# EAGLE board LibreServo_v1_a (EAGLE 9.2.0), part 1 of 2
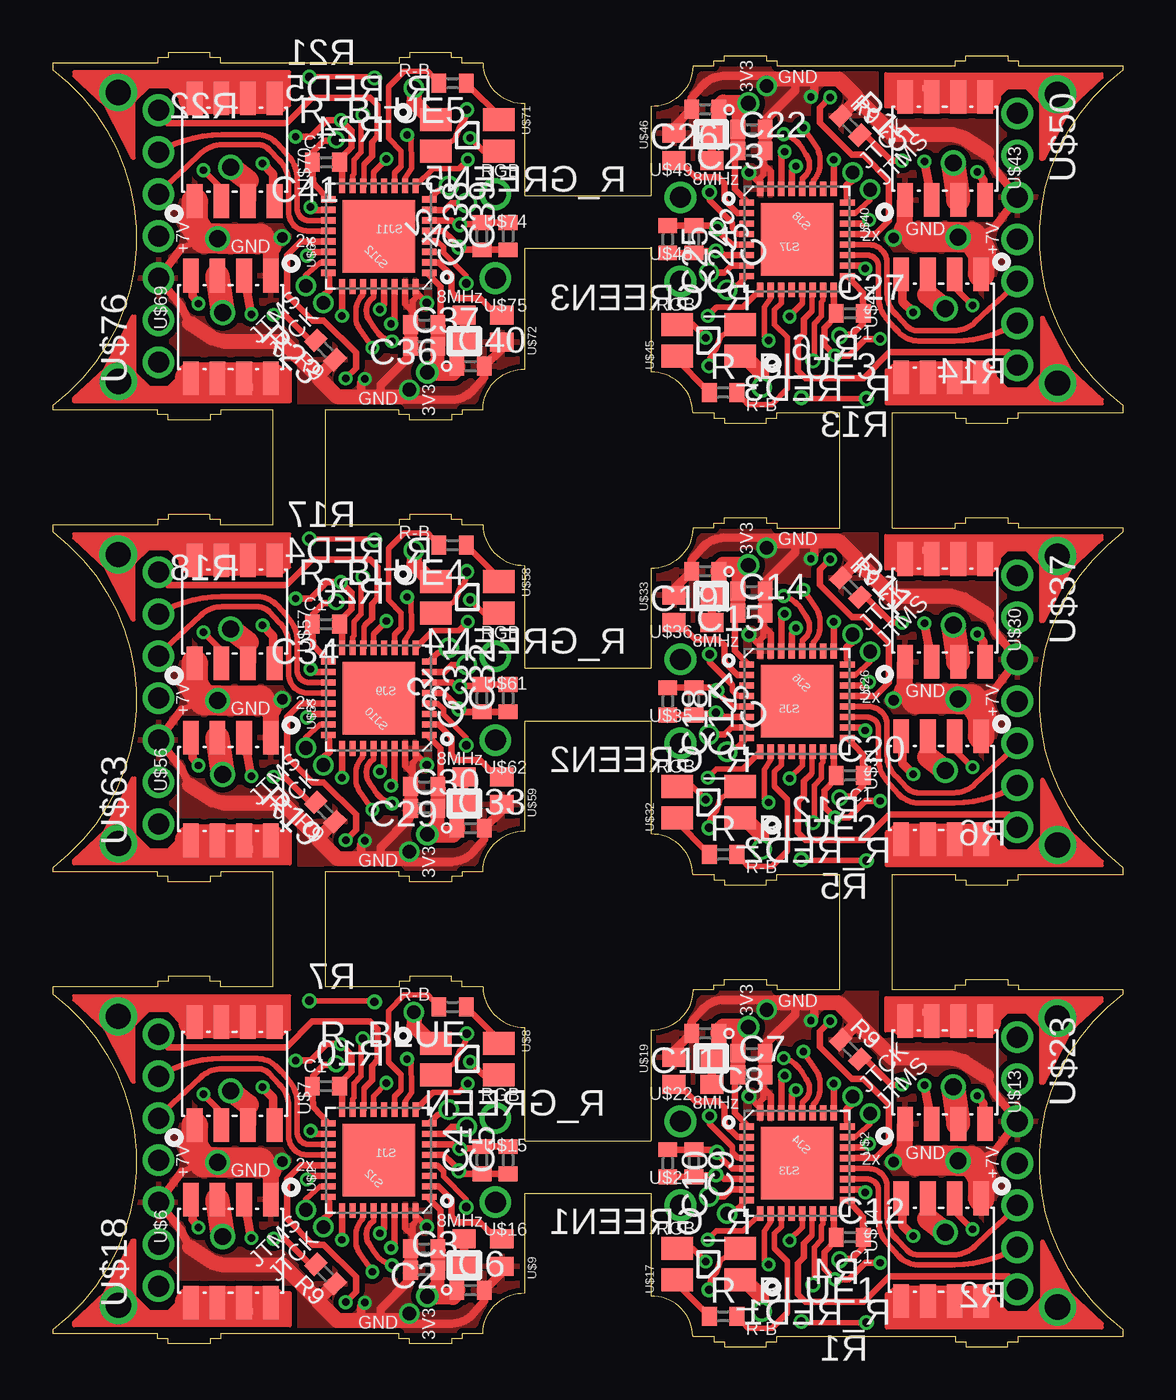
[diagram p0: board, top side]
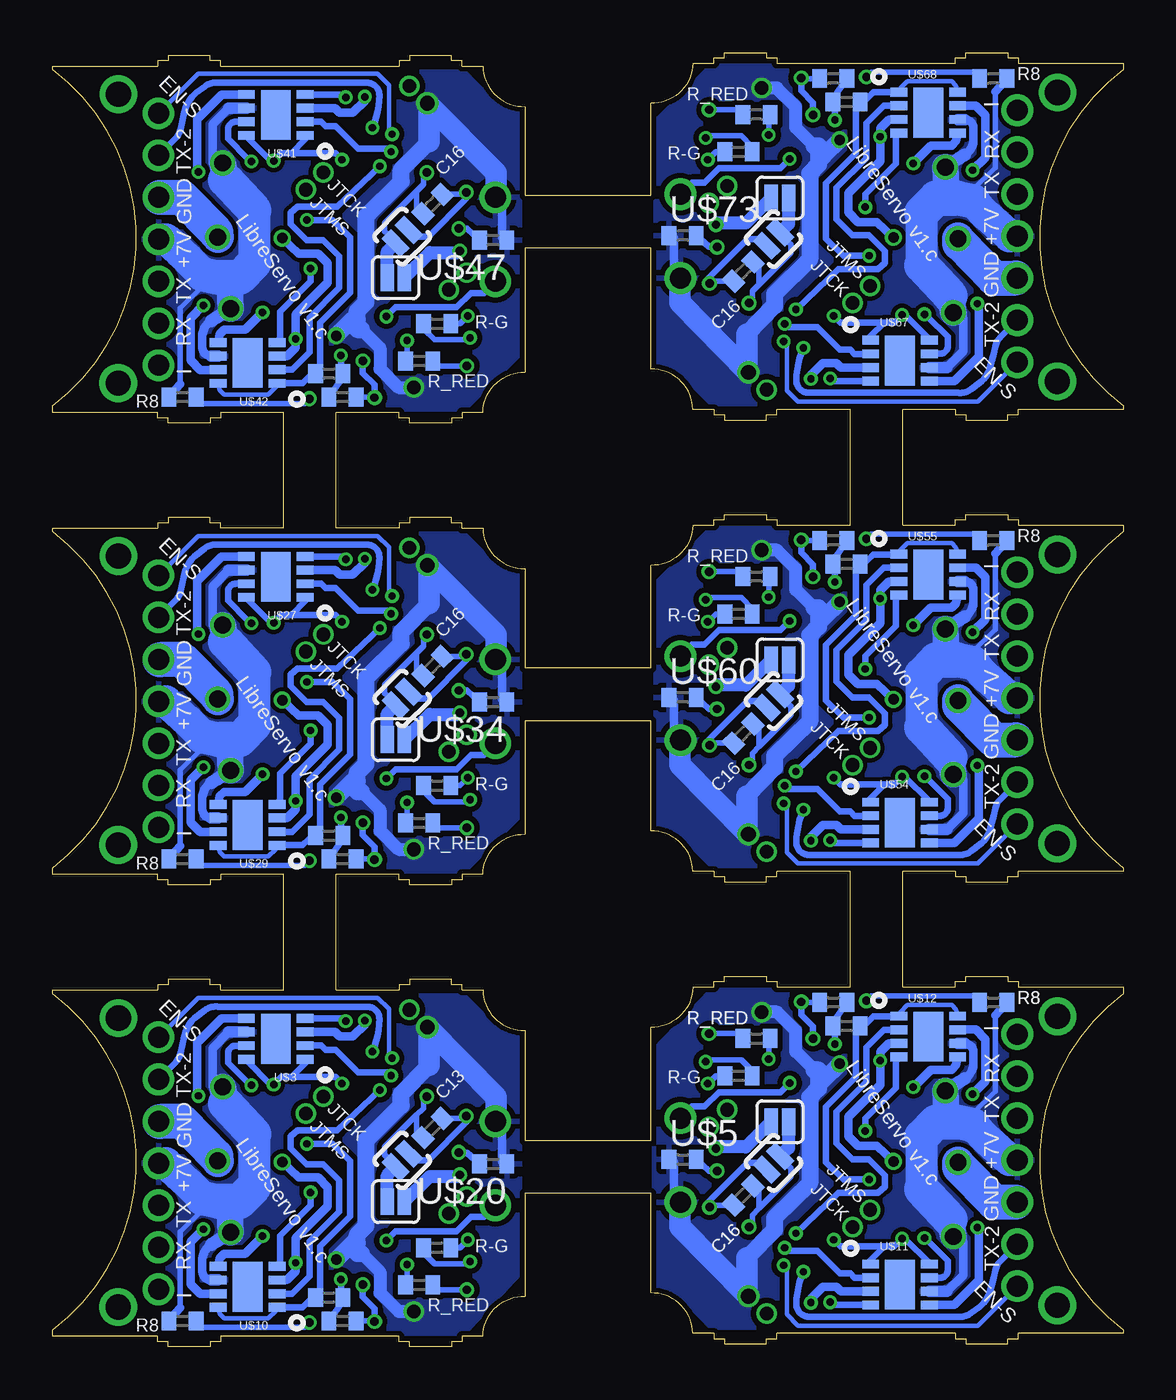
[diagram p1: board, bottom side, seen from below]

Size 51 x 61.65 mm. Coordinates in mm from the lower left corner, seen from the top.
Outline: 20.5,17.15 19.5,17.15 19.5,17.4 19,17.4 19,17.65 17,17.65 17,17.4 16.5,17.4 16.5,17.15 13,17.15 13,22.65 16.5,22.65 16.5,22.4 17,22.4 17,22.15 19,22.15 19,22.4 19.5,22.4 19.5,22.65 20.5,22.65 arc-90 22.5,24.57 22.5,29.82 28.5,29.82 28.5,24.43 arc-90 30.5,22.5 31.5,22.5 31.5,22.25 32,22.25 32,22 34,22 34,22.25 34.5,22.25 34.5,22.5 37.5,22.5 37.5,17 34.5,17 34.5,17.25 34,17.25 34,17.5 32,17.5 32,17.25 31.5,17.25 31.5,17 30.5,17 arc-90 28.5,15.07 28.5,9.82 22.5,9.82 22.5,15.22 arc-90 20.5,17.15
Outline: 10.5,17.15 8,17.15 8,17.4 7.5,17.4 7.5,17.65 5.5,17.65 5.5,17.4 5,17.4 5,17.15 0,17.15 0,16.82 arc-106 0,0.82 0,0.65 5,0.65 5,0.4 5.5,0.4 5.5,0.15 7.5,0.15 7.5,0.4 8,0.4 8,0.65 16.5,0.65 16.5,0.4 17,0.4 17,0.15 19,0.15 19,0.4 19.5,0.4 19.5,0.65 20.5,0.65 arc-90 22.5,2.58 22.5,7.33 28.5,7.33 28.5,2.43 arc-90 30.5,0.5 31.5,0.5 31.5,0.25 32,0.25 32,0 34,0 34,0.25 34.5,0.25 34.5,0.5 43,0.5 43,0.25 43.5,0.25 43.5,0 45.5,0 45.5,0.25 46,0.25 46,0.5 51,0.5 51,0.82 arc-106 51,16.82 51,17 46,17 46,17.25 45.5,17.25 45.5,17.5 43.5,17.5 43.5,17.25 43,17.25 43,17 40,17 40,22.5 43,22.5 43,22.25 43.5,22.25 43.5,22 45.5,22 45.5,22.25 46,22.25 46,22.5 51,22.5 51,22.82 arc-106 51,38.83 51,39 46,39 46,39.25 45.5,39.25 45.5,39.5 43.5,39.5 43.5,39.25 43,39.25 43,39 40,39 40,44.5 43,44.5 43,44.25 43.5,44.25 43.5,44 45.5,44 45.5,44.25 46,44.25 46,44.5 51,44.5 51,44.83 arc-106 51,60.83 51,61 46,61 46,61.25 45.5,61.25 45.5,61.5 43.5,61.5 43.5,61.25 43,61.25 43,61 34.5,61 34.5,61.25 34,61.25 34,61.5 32,61.5 32,61.25 31.5,61.25 31.5,61 30.5,61 arc-90 28.5,59.08 28.5,54.83 22.5,54.83 22.5,59.23 arc-90 20.5,61.15 19.5,61.15 19.5,61.4 19,61.4 19,61.65 17,61.65 17,61.4 16.5,61.4 16.5,61.15 8,61.15 8,61.4 7.5,61.4 7.5,61.65 5.5,61.65 5.5,61.4 5,61.4 5,61.15 0,61.15 0,60.83 arc-106 0,44.83 0,44.65 5,44.65 5,44.4 5.5,44.4 5.5,44.15 7.5,44.15 7.5,44.4 8,44.4 8,44.65 10.5,44.65 10.5,39.15 8,39.15 8,39.4 7.5,39.4 7.5,39.65 5.5,39.65 5.5,39.4 5,39.4 5,39.15 0,39.15 0,38.83 arc-106 0,22.82 0,22.65 5,22.65 5,22.4 5.5,22.4 5.5,22.15 7.5,22.15 7.5,22.4 8,22.4 8,22.65 10.5,22.65 10.5,17.15
Outline: 31.5,39 30.5,39 arc-90 28.5,37.08 28.5,32.33 22.5,32.33 22.5,37.23 arc-90 20.5,39.15 19.5,39.15 19.5,39.4 19,39.4 19,39.65 17,39.65 17,39.4 16.5,39.4 16.5,39.15 13,39.15 13,44.65 16.5,44.65 16.5,44.4 17,44.4 17,44.15 19,44.15 19,44.4 19.5,44.4 19.5,44.65 20.5,44.65 arc-90 22.5,46.58 22.5,52.33 28.5,52.33 28.5,46.43 arc-90 30.5,44.5 31.5,44.5 31.5,44.25 32,44.25 32,44 34,44 34,44.25 34.5,44.25 34.5,44.5 37.5,44.5 37.5,39 34.5,39 34.5,39.25 34,39.25 34,39.5 32,39.5 32,39.25 31.5,39.25 31.5,39
Copper layers (1*16): Top 0.035mm / dielectric 1.5mm / Bottom 0.035mm
Design rules "ITEADstudio_DRC": minimum track width 6mil, minimum drill 12mil, track to track 6mil, track to pad 6mil, pad to pad 6mil, via to via 6mil, smd to smd 0mil, copper to edge 10mil, drill to drill 10mil, minimum pad ring 10mil, minimum via ring 6mil, stop-mask expansion 2mil, vias tented up to drill 100mil, thermal gap 10mil

## Footprints (pad centres in the part's own frame; a part is rotated, then mirrored left to right if it is on the bottom)
C0402 = smd 0.7 x 0.9: 1 -0.65,0; 2 0.65,0
R0402 = smd 0.7 x 0.9: 1 -0.65,0; 2 0.65,0
SJ_2S = smd 0.635 x 1.27: 1 -0.412,0; 2 0.412,0
SJ_2S-NO = smd 0.635 x 1.27: 1 -0.45,0; 2 0.45,0
QFN32 = smd 0.3 x 0.7: 1 -1.75,-2.4; 2 -1.25,-2.4; 3 -0.75,-2.4; 4 -0.25,-2.4; 5 0.25,-2.4; 6 0.75,-2.4; 7 1.25,-2.4; 8 1.75,-2.4; 17 1.75,2.4; 18 1.25,2.4; 19 0.75,2.4; 20 0.25,2.4; 21 -0.25,2.4; 22 -0.75,2.4; 23 -1.25,2.4; 24 -1.75,2.4 | smd 0.7 x 0.3: 9 2.4,-1.75; 10 2.4,-1.25; 11 2.4,-0.75; 12 2.4,-0.25; 13 2.4,0.25; 14 2.4,0.75; 15 2.4,1.25; 16 2.4,1.75; 25 -2.4,1.75; 26 -2.4,1.25; 27 -2.4,0.75; 28 -2.4,0.25; 29 -2.4,-0.25; 30 -2.4,-0.75; 31 -2.4,-1.25; 32 -2.4,-1.75 | smd 3.45 x 3.45: EP 0,0
MLP8 = smd 0.8 x 0.42: P$1 -1.4,0.975; P$2 -1.4,0.325; P$3 -1.4,-0.325; P$4 -1.4,-0.975; P$5 1.4,-0.975; P$6 1.4,-0.325; P$7 1.4,0.325; P$8 1.4,0.975 | smd 1.42 x 2.37: P$9 0,0
PAD_LIBRE_SERVO_V1_A = smd 0.5 x 0.3: P$1 0,0 | drill 1.2: P$2 6.172,0.279
0402 = smd 0.7 x 0.9: 1 -0.65,0; 2 0.65,0
SO-8 = smd 1.6 x 0.75: P$1 -2.45,1.905; P$2 -2.45,0.635; P$3 -2.45,-0.635; P$4 -2.45,-1.905; P$5 2.45,-1.905; P$6 2.45,-0.635; P$7 2.45,0.635; P$8 2.45,1.905
PLCC4 = smd 1.1 x 1.5: P$1 -0.75,-1.5; P$2 -0.75,1.5; P$3 0.75,1.5; P$4 0.75,-1.5
OSC-2.5X2 = smd 0.9 x 1.1: P$1 -0.65,0.9; P$2 -0.65,-0.9; P$3 0.65,-0.9; P$4 0.65,0.9
HEADER_1_MIN = drill 1: P$1 0,0
HEADER_7_MIN = drill 1: P$1 0,0; P$2 2,0; P$3 4,0; P$4 6,0; P$5 8,0; P$6 10,0; P$7 12,0
PAD_LIBRE_SERVO_V1_B = smd 0.5 x 0.3: P$1 0,0 | drill 1.2: P$2 6.172,-0.279

## Placement (x,y rotation side)
C1  100nF  [C0402]  13.03,12.42 180 top
C2  100nF  [C0402]  17.71,4.69 180 top
C3  4.7uF  [C0402]  17.7,3.66 0 top
C4  100nF  [C0402]  20.45,8.9 90 top
C5  1uF  [C0402]  21.7,8.9 90 top
C6  100nF  [C0402]  19.91,2.71 0 top
C7  100nF  [C0402]  33.29,12.96 0 top
C8  4.7uF  [C0402]  33.3,13.99 180 top
C9  100nF  [C0402]  30.55,8.75 270 top
C10  1uF  [C0402]  29.3,8.75 270 top
C11  100nF  [C0402]  31.09,14.94 180 top
C12  100nF  [C0402]  37.97,5.23 0 top
C13  100nF  [C0402]  32.89,10.43 225 bottom
C14  100nF  [C0402]  33.29,34.96 0 top
C15  4.7uF  [C0402]  33.3,35.99 180 top
C16  100nF  [C0402]  18.11,7.22 45 bottom
C17  100nF  [C0402]  30.55,30.75 270 top
C18  1uF  [C0402]  29.3,30.75 270 top
C19  100nF  [C0402]  31.09,36.94 180 top
C20  100nF  [C0402]  37.97,27.23 0 top
C21  100nF  [C0402]  32.89,32.43 225 bottom
C22  100nF  [C0402]  33.29,56.96 0 top
C23  4.7uF  [C0402]  33.3,57.99 180 top
C24  100nF  [C0402]  30.55,52.75 270 top
C25  1uF  [C0402]  29.3,52.75 270 top
C26  100nF  [C0402]  31.09,58.94 180 top
C27  100nF  [C0402]  37.97,49.23 0 top
C28  100nF  [C0402]  32.89,54.43 225 bottom
C29  100nF  [C0402]  17.71,26.69 180 top
C30  4.7uF  [C0402]  17.7,25.66 0 top
C31  100nF  [C0402]  20.45,30.9 90 top
C32  1uF  [C0402]  21.7,30.9 90 top
C33  100nF  [C0402]  19.91,24.71 0 top
C34  100nF  [C0402]  13.03,34.42 180 top
C35  100nF  [C0402]  18.11,29.22 45 bottom
C36  100nF  [C0402]  17.71,48.69 180 top
C37  4.7uF  [C0402]  17.7,47.66 0 top
C38  100nF  [C0402]  20.45,52.9 90 top
C39  1uF  [C0402]  21.7,52.9 90 top
C40  100nF  [C0402]  19.91,46.71 0 top
C41  100nF  [C0402]  13.03,56.42 180 top
C42  100nF  [C0402]  18.11,51.22 45 bottom
R1  10K  [R0402]  37.19,1.24 180 bottom
R2  51K  [R0402]  44.81,1.24 0 bottom
R3  10K  [R0402]  38,14.17 315 top
R4  10K  [R0402]  37.82,2.36 0 bottom
R5  10K  [R0402]  37.19,23.24 180 bottom
R6  51K  [R0402]  44.81,23.24 0 bottom
R7  10K  [R0402]  13.81,16.41 0 bottom
R8  51K  [R0402]  6.19,16.41 180 bottom
R9  10K  [R0402]  13,3.48 135 top
R10  10K  [R0402]  13.18,15.29 180 bottom
R11  10K  [R0402]  38,36.17 315 top
R12  10K  [R0402]  37.82,24.36 0 bottom
R13  10K  [R0402]  37.19,45.24 180 bottom
R14  51K  [R0402]  44.81,45.24 0 bottom
R15  10K  [R0402]  38,58.17 315 top
R16  10K  [R0402]  37.82,46.36 0 bottom
R17  10K  [R0402]  13.81,38.41 0 bottom
R18  51K  [R0402]  6.19,38.41 180 bottom
R19  10K  [R0402]  13,25.48 135 top
R20  10K  [R0402]  13.18,37.29 180 bottom
R21  10K  [R0402]  13.81,60.41 0 bottom
R22  51K  [R0402]  6.19,60.41 180 bottom
R23  10K  [R0402]  13,47.48 135 top
R24  10K  [R0402]  13.18,59.29 180 bottom
R_BLUE  470  [R0402]  19.06,16.19 180 top
R_BLUE1  470  [R0402]  31.94,1.46 0 top
R_BLUE2  470  [R0402]  31.94,23.46 0 top
R_BLUE3  470  [R0402]  31.94,45.46 0 top
R_BLUE4  470  [R0402]  19.06,38.19 180 top
R_BLUE5  470  [R0402]  19.06,60.19 180 top
R_GREEN  300  [R0402]  18.33,12.92 180 bottom
R_GREEN1  300  [R0402]  32.67,4.73 0 bottom
R_GREEN2  300  [R0402]  32.67,26.73 0 bottom
R_GREEN3  300  [R0402]  32.67,48.73 0 bottom
R_GREEN4  300  [R0402]  18.33,34.92 180 bottom
R_GREEN5  300  [R0402]  18.33,56.92 180 bottom
R_RED  330  [R0402]  17.47,14.69 0 bottom
R_RED1  330  [R0402]  33.53,2.96 180 bottom
R_RED2  330  [R0402]  33.53,24.96 180 bottom
R_RED3  330  [R0402]  33.53,46.96 180 bottom
R_RED4  330  [R0402]  17.47,36.69 0 bottom
R_RED5  330  [R0402]  17.47,58.69 0 bottom
SJ1  SOLDAR  [SJ_2S]  16.35,10.72 180 bottom
SJ2  NO-SOLDAR  [SJ_2S-NO]  16.66,8.77 225 bottom
SJ3  SOLDAR  [SJ_2S]  34.65,6.93 0 bottom
SJ4  NO-SOLDAR  [SJ_2S-NO]  34.34,8.88 45 bottom
SJ5  SOLDAR  [SJ_2S]  34.65,28.93 0 bottom
SJ6  NO-SOLDAR  [SJ_2S-NO]  34.34,30.88 45 bottom
SJ7  SOLDAR  [SJ_2S]  34.65,50.93 0 bottom
SJ8  NO-SOLDAR  [SJ_2S-NO]  34.34,52.88 45 bottom
SJ9  SOLDAR  [SJ_2S]  16.35,32.72 180 bottom
SJ10  NO-SOLDAR  [SJ_2S-NO]  16.66,30.77 225 bottom
SJ11  SOLDAR  [SJ_2S]  16.35,54.72 180 bottom
SJ12  NO-SOLDAR  [SJ_2S-NO]  16.66,52.77 225 bottom
U$1  STM32F302  [QFN32]  15.54,8.9 90 top
U$2  STM32F302  [QFN32]  35.46,8.75 270 top
U$3  FAN3227/3  [MLP8]  40.36,14.68 180 bottom
U$4  PAD_LIBRE_SERVO_V1_A  [PAD_LIBRE_SERVO_V1_A]  9.3,16.02 180 top
U$5  FERRITA  [0402]  20.99,8.94 0 bottom
U$6  FDS8858CZ  [SO-8]  8.49,4.57 270 top
U$7  FDS8858CZ  [SO-8]  8.68,13.02 90 top
U$8  RGB_PLCC4  [PLCC4]  19.76,13.71 270 top
U$9  OSC-8MHz  [OSC-2.5X2]  20.5,4.5 90 top
U$10  FAN3227/3  [MLP8]  41.71,2.87 180 bottom
U$11  FAN3227/3  [MLP8]  10.64,2.97 0 bottom
U$12  FAN3227/3  [MLP8]  9.29,14.79 0 bottom
U$13  FDS8858CZ  [SO-8]  42.51,13.08 90 top
U$14  FDS8858CZ  [SO-8]  42.32,4.63 270 top
U$15  HEADER_1_MIN  [HEADER_1_MIN]  21.1,10.9 180 top
U$16  HEADER_1_MIN  [HEADER_1_MIN]  21.1,6.9 180 top
U$17  RGB_PLCC4  [PLCC4]  31.24,3.94 90 top
U$18  HEADER_7_MIN  [HEADER_7_MIN]  5.05,2.9 90 top
U$19  OSC-8MHz  [OSC-2.5X2]  30.5,13.15 270 top
U$20  FERRITA  [0402]  30.01,8.71 180 bottom
U$21  HEADER_1_MIN  [HEADER_1_MIN]  29.9,6.75 0 top
U$22  HEADER_1_MIN  [HEADER_1_MIN]  29.9,10.75 0 top
U$23  HEADER_7_MIN  [HEADER_7_MIN]  45.95,14.75 270 top
U$24  PAD_LIBRE_SERVO_V1_A  [PAD_LIBRE_SERVO_V1_A]  41.7,1.62 0 top
U$25  PAD_LIBRE_SERVO_V1_B  [PAD_LIBRE_SERVO_V1_B]  41.68,15.95 0 top
U$26  STM32F302  [QFN32]  35.46,30.75 270 top
U$27  FAN3227/3  [MLP8]  40.36,36.68 180 bottom
U$28  PAD_LIBRE_SERVO_V1_B  [PAD_LIBRE_SERVO_V1_B]  9.32,1.7 180 top
U$29  FAN3227/3  [MLP8]  41.71,24.86 180 bottom
U$30  FDS8858CZ  [SO-8]  42.51,35.08 90 top
U$31  FDS8858CZ  [SO-8]  42.32,26.63 270 top
U$32  RGB_PLCC4  [PLCC4]  31.24,25.94 90 top
U$33  OSC-8MHz  [OSC-2.5X2]  30.5,35.15 270 top
U$34  FERRITA  [0402]  30.01,30.71 180 bottom
U$35  HEADER_1_MIN  [HEADER_1_MIN]  29.9,28.75 0 top
U$36  HEADER_1_MIN  [HEADER_1_MIN]  29.9,32.75 0 top
U$37  HEADER_7_MIN  [HEADER_7_MIN]  45.95,36.75 270 top
U$38  PAD_LIBRE_SERVO_V1_A  [PAD_LIBRE_SERVO_V1_A]  41.7,23.62 0 top
U$39  PAD_LIBRE_SERVO_V1_B  [PAD_LIBRE_SERVO_V1_B]  41.68,37.95 0 top
U$40  STM32F302  [QFN32]  35.46,52.75 270 top
U$41  FAN3227/3  [MLP8]  40.36,58.68 180 bottom
U$42  FAN3227/3  [MLP8]  41.71,46.87 180 bottom
U$43  FDS8858CZ  [SO-8]  42.51,57.08 90 top
U$44  FDS8858CZ  [SO-8]  42.32,48.63 270 top
U$45  RGB_PLCC4  [PLCC4]  31.24,47.94 90 top
U$46  OSC-8MHz  [OSC-2.5X2]  30.5,57.15 270 top
U$47  FERRITA  [0402]  30.01,52.71 180 bottom
U$48  HEADER_1_MIN  [HEADER_1_MIN]  29.9,50.75 0 top
U$49  HEADER_1_MIN  [HEADER_1_MIN]  29.9,54.75 0 top
U$50  HEADER_7_MIN  [HEADER_7_MIN]  45.95,58.75 270 top
U$51  PAD_LIBRE_SERVO_V1_A  [PAD_LIBRE_SERVO_V1_A]  41.7,45.62 0 top
U$52  PAD_LIBRE_SERVO_V1_B  [PAD_LIBRE_SERVO_V1_B]  41.68,59.95 0 top
U$53  STM32F302  [QFN32]  15.54,30.9 90 top
U$54  FAN3227/3  [MLP8]  10.64,24.97 0 bottom
U$55  FAN3227/3  [MLP8]  9.29,36.79 0 bottom
U$56  FDS8858CZ  [SO-8]  8.49,26.57 270 top
U$57  FDS8858CZ  [SO-8]  8.68,35.02 90 top
U$58  RGB_PLCC4  [PLCC4]  19.76,35.71 270 top
U$59  OSC-8MHz  [OSC-2.5X2]  20.5,26.5 90 top
U$60  FERRITA  [0402]  20.99,30.94 0 bottom
U$61  HEADER_1_MIN  [HEADER_1_MIN]  21.1,32.9 180 top
U$62  HEADER_1_MIN  [HEADER_1_MIN]  21.1,28.9 180 top
U$63  HEADER_7_MIN  [HEADER_7_MIN]  5.05,24.9 90 top
U$64  PAD_LIBRE_SERVO_V1_A  [PAD_LIBRE_SERVO_V1_A]  9.3,38.03 180 top
U$65  PAD_LIBRE_SERVO_V1_B  [PAD_LIBRE_SERVO_V1_B]  9.32,23.7 180 top
U$66  STM32F302  [QFN32]  15.54,52.9 90 top
U$67  FAN3227/3  [MLP8]  10.64,46.97 0 bottom
U$68  FAN3227/3  [MLP8]  9.29,58.79 0 bottom
U$69  FDS8858CZ  [SO-8]  8.49,48.57 270 top
U$70  FDS8858CZ  [SO-8]  8.68,57.02 90 top
U$71  RGB_PLCC4  [PLCC4]  19.76,57.71 270 top
U$72  OSC-8MHz  [OSC-2.5X2]  20.5,48.5 90 top
U$73  FERRITA  [0402]  20.99,52.94 0 bottom
U$74  HEADER_1_MIN  [HEADER_1_MIN]  21.1,54.9 180 top
U$75  HEADER_1_MIN  [HEADER_1_MIN]  21.1,50.9 180 top
U$76  HEADER_7_MIN  [HEADER_7_MIN]  5.05,46.9 90 top
U$77  PAD_LIBRE_SERVO_V1_A  [PAD_LIBRE_SERVO_V1_A]  9.3,60.03 180 top
U$78  PAD_LIBRE_SERVO_V1_B  [PAD_LIBRE_SERVO_V1_B]  9.32,45.7 180 top

## Library data of the parts
C1-C42 R1-R24 R_BLUE R_BLUE1-R_BLUE5 R_GREEN R_GREEN1-R_GREEN5 R_RED R_RED1-R_RED5 = rcl
SJ1-SJ12 = SparkFun-Passives
U$1-U$78 = Propio

## Nets
+3V3_1: C1.2 C2.1 C3.2 C6.1 U$1.1 U$1.17 U$5.1 U$8.P$1 U$9.P$1 U$9.P$4 U$16.P$1
+3V3_2: C7.1 C8.2 C11.1 C12.2 U$2.1 U$2.17 U$17.P$1 U$19.P$1 U$19.P$4 U$20.1 U$22.P$1
+3V3_3: C14.1 C15.2 C19.1 C20.2 U$26.1 U$26.17 U$32.P$1 U$33.P$1 U$33.P$4 U$34.1 U$36.P$1
+3V3_4: C22.1 C23.2 C26.1 C27.2 U$40.1 U$40.17 U$45.P$1 U$46.P$1 U$46.P$4 U$47.1 U$49.P$1
+3V3_5: C29.1 C30.2 C33.1 C34.2 U$53.1 U$53.17 U$58.P$1 U$59.P$1 U$59.P$4 U$60.1 U$62.P$1
+3V3_6: C36.1 C37.2 C40.1 C41.2 U$66.1 U$66.17 U$71.P$1 U$72.P$1 U$72.P$4 U$73.1 U$75.P$1
+7V_1: R8.1 U$6.P$3 U$7.P$3 U$11.P$6 U$12.P$6 U$18.P$4
+7V_2: R2.1 U$3.P$6 U$10.P$6 U$13.P$3 U$14.P$3 U$23.P$4
+7V_3: R6.1 U$27.P$6 U$29.P$6 U$30.P$3 U$31.P$3 U$37.P$4
+7V_4: R14.1 U$41.P$6 U$42.P$6 U$43.P$3 U$44.P$3 U$50.P$4
+7V_5: R18.1 U$54.P$6 U$55.P$6 U$56.P$3 U$57.P$3 U$63.P$4
+7V_6: R22.1 U$67.P$6 U$68.P$6 U$69.P$3 U$70.P$3 U$76.P$4
EN_Q1: R9.2 U$1.25 U$11.P$1 U$11.P$8
EN_Q2: R10.1 U$1.22 U$12.P$1 U$12.P$8
EN_Q3: R3.2 U$2.25 U$3.P$1 U$3.P$8
EN_Q4: R4.1 U$2.22 U$10.P$1 U$10.P$8
EN_Q5: R11.2 U$26.25 U$27.P$1 U$27.P$8
EN_Q6: R12.1 U$26.22 U$29.P$1 U$29.P$8
EN_Q7: R15.2 U$40.25 U$41.P$1 U$41.P$8
EN_Q8: R16.1 U$40.22 U$42.P$1 U$42.P$8
EN_Q9: R19.2 U$53.25 U$54.P$1 U$54.P$8
EN_Q10: R20.1 U$53.22 U$55.P$1 U$55.P$8
EN_Q11: R23.2 U$66.25 U$67.P$1 U$67.P$8
EN_Q12: R24.1 U$66.22 U$68.P$1 U$68.P$8
EN_SERIAL_1: U$1.28 U$18.P$1
EN_SERIAL_2: U$2.28 U$23.P$1
EN_SERIAL_3: U$26.28 U$37.P$1
EN_SERIAL_4: U$40.28 U$50.P$1
EN_SERIAL_5: U$53.28 U$63.P$1
EN_SERIAL_6: U$66.28 U$76.P$1
GND_1: C1.1 C2.2 C3.1 C6.2 C16.2 R7.2 R9.1 R10.2 SJ1.1 SJ2.1 U$1.16 U$1.31 U$1.32 U$6.P$1 U$7.P$1 U$9.P$2 U$11.P$3 U$12.P$3 U$18.P$3
GND_2: C7.2 C8.1 C11.2 C12.1 C13.2 R1.2 R3.1 R4.2 SJ3.1 SJ4.1 U$2.16 U$2.31 U$2.32 U$3.P$3 U$10.P$3 U$13.P$1 U$14.P$1 U$19.P$2 U$23.P$3
GND_3: C14.2 C15.1 C19.2 C20.1 C21.2 R5.2 R11.1 R12.2 SJ5.1 SJ6.1 U$26.16 U$26.31 U$26.32 U$27.P$3 U$29.P$3 U$30.P$1 U$31.P$1 U$33.P$2 U$37.P$3
GND_4: C22.2 C23.1 C26.2 C27.1 C28.2 R13.2 R15.1 R16.2 SJ7.1 SJ8.1 U$40.16 U$40.31 U$40.32 U$41.P$3 U$42.P$3 U$43.P$1 U$44.P$1 U$46.P$2 U$50.P$3
GND_5: C29.2 C30.1 C33.2 C34.1 C35.2 R17.2 R19.1 R20.2 SJ9.1 SJ10.1 U$53.16 U$53.31 U$53.32 U$54.P$3 U$55.P$3 U$56.P$1 U$57.P$1 U$59.P$2 U$63.P$3
GND_6: C36.2 C37.1 C40.2 C41.1 C42.2 R21.2 R23.1 R24.2 SJ11.1 SJ12.1 U$66.16 U$66.31 U$66.32 U$67.P$3 U$68.P$3 U$69.P$1 U$70.P$1 U$72.P$2 U$76.P$3
GNDA: C4.2 C5.2 SJ1.2 U$1.6
GNDA1: C9.2 C10.2 SJ3.2 U$2.6
GNDA2: C17.2 C18.2 SJ5.2 U$26.6
GNDA3: C24.2 C25.2 SJ7.2 U$40.6
GNDA4: C31.2 C32.2 SJ9.2 U$53.6
GNDA5: C38.2 C39.2 SJ11.2 U$66.6
JTCK: U$1.24
JTCK1: U$2.24
JTCK2: U$26.24
JTCK3: U$40.24
JTCK4: U$53.24
JTCK5: U$66.24
JTMS: U$1.23
JTMS1: U$2.23
JTMS2: U$26.23
JTMS3: U$40.23
JTMS4: U$53.23
JTMS5: U$66.23
LED_BLUE: R_BLUE.2 U$1.11
LED_BLUE1: R_BLUE1.2 U$2.11
LED_BLUE2: R_BLUE2.2 U$26.11
LED_BLUE3: R_BLUE3.2 U$40.11
LED_BLUE4: R_BLUE4.2 U$53.11
LED_BLUE5: R_BLUE5.2 U$66.11
LED_GREEN: R_GREEN.2 U$1.9
LED_GREEN1: R_GREEN1.2 U$2.9
LED_GREEN2: R_GREEN2.2 U$26.9
LED_GREEN3: R_GREEN3.2 U$40.9
LED_GREEN4: R_GREEN4.2 U$53.9
LED_GREEN5: R_GREEN5.2 U$66.9
LED_RED: R_RED.2 U$1.10
LED_RED1: R_RED1.2 U$2.10
LED_RED2: R_RED2.2 U$26.10
LED_RED3: R_RED3.2 U$40.10
LED_RED4: R_RED4.2 U$53.10
LED_RED5: R_RED5.2 U$66.10
N$1: R_BLUE.1 U$8.P$2
N$2: R_GREEN.1 U$8.P$3
N$3: R_RED.1 U$8.P$4
N$4: U$2.2 U$19.P$3
N$5: U$1.2 U$9.P$3
N$6: U$1.8
N$7: U$1.7
N$8: U$3.P$7 U$13.P$2
N$9: U$3.P$5 U$13.P$4
N$10: U$6.P$2 U$11.P$7
N$11: U$10.P$7 U$14.P$2
N$12: U$10.P$5 U$14.P$4
N$13: U$13.P$5 U$13.P$6 U$13.P$7 U$13.P$8 U$25.P$1 U$25.P$2
N$14: U$6.P$4 U$11.P$5
N$15: U$7.P$2 U$12.P$7
N$16: U$14.P$5 U$14.P$6 U$14.P$7 U$14.P$8 U$24.P$1 U$24.P$2
N$17: R_BLUE1.1 U$17.P$2
N$18: U$7.P$4 U$12.P$5
N$19: U$6.P$5 U$6.P$6 U$6.P$7 U$6.P$8 U$28.P$1 U$28.P$2
N$20: R_GREEN1.1 U$17.P$3
N$21: R_RED1.1 U$17.P$4
N$22: U$2.8
N$23: U$2.7
N$24: U$26.2 U$33.P$3
N$25: U$27.P$7 U$30.P$2
N$26: U$4.P$1 U$4.P$2 U$7.P$5 U$7.P$6 U$7.P$7 U$7.P$8
N$27: U$27.P$5 U$30.P$4
N$28: U$29.P$7 U$31.P$2
N$29: U$29.P$5 U$31.P$4
N$30: U$30.P$5 U$30.P$6 U$30.P$7 U$30.P$8 U$39.P$1 U$39.P$2
N$31: U$31.P$5 U$31.P$6 U$31.P$7 U$31.P$8 U$38.P$1 U$38.P$2
N$32: R_BLUE2.1 U$32.P$2
N$33: R_GREEN2.1 U$32.P$3
N$34: R_RED2.1 U$32.P$4
N$35: U$26.8
N$36: U$26.7
N$37: U$40.2 U$46.P$3
N$38: U$41.P$7 U$43.P$2
N$39: U$41.P$5 U$43.P$4
N$40: U$42.P$7 U$44.P$2
N$41: U$42.P$5 U$44.P$4
N$42: U$43.P$5 U$43.P$6 U$43.P$7 U$43.P$8 U$52.P$1 U$52.P$2
N$43: U$44.P$5 U$44.P$6 U$44.P$7 U$44.P$8 U$51.P$1 U$51.P$2
N$44: R_BLUE3.1 U$45.P$2
N$45: R_GREEN3.1 U$45.P$3
N$46: R_RED3.1 U$45.P$4
N$47: U$40.8
N$48: U$40.7
N$49: U$53.2 U$59.P$3
N$50: U$54.P$7 U$56.P$2
N$51: U$54.P$5 U$56.P$4
N$52: U$55.P$7 U$57.P$2
N$53: U$55.P$5 U$57.P$4
N$54: U$56.P$5 U$56.P$6 U$56.P$7 U$56.P$8 U$65.P$1 U$65.P$2
N$55: U$57.P$5 U$57.P$6 U$57.P$7 U$57.P$8 U$64.P$1 U$64.P$2
N$56: R_BLUE4.1 U$58.P$2
N$57: R_GREEN4.1 U$58.P$3
N$58: R_RED4.1 U$58.P$4
N$59: U$53.8
N$60: U$53.7
N$61: U$66.2 U$72.P$3
N$62: U$67.P$7 U$69.P$2
N$63: U$67.P$5 U$69.P$4
N$64: U$68.P$7 U$70.P$2
N$65: U$68.P$5 U$70.P$4
N$66: U$69.P$5 U$69.P$6 U$69.P$7 U$69.P$8 U$78.P$1 U$78.P$2
N$67: U$70.P$5 U$70.P$6 U$70.P$7 U$70.P$8 U$77.P$1 U$77.P$2
N$68: R_BLUE5.1 U$71.P$2
N$69: R_GREEN5.1 U$71.P$3
N$70: R_RED5.1 U$71.P$4
N$71: U$66.8
N$72: U$66.7
NRST: C16.1 SJ2.2 U$1.4
NRST1: C13.1 SJ4.2 U$2.4
NRST2: C21.1 SJ6.2 U$26.4
NRST3: C28.1 SJ8.2 U$40.4
NRST4: C35.1 SJ10.2 U$53.4
NRST5: C42.1 SJ12.2 U$66.4
Q1_INA_N: U$1.30 U$11.P$2
Q1_INA_N1: U$2.30 U$3.P$2
Q1_INA_N2: U$26.30 U$27.P$2
Q1_INA_N3: U$40.30 U$41.P$2
Q1_INA_N4: U$53.30 U$54.P$2
Q1_INA_N5: U$66.30 U$67.P$2
Q2_INA_N: U$1.29 U$12.P$2
Q2_INA_N1: U$2.29 U$10.P$2
Q2_INA_N2: U$26.29 U$29.P$2
Q2_INA_N3: U$40.29 U$42.P$2
Q2_INA_N4: U$53.29 U$55.P$2
Q2_INA_N5: U$66.29 U$68.P$2
RX_1: U$1.19 U$18.P$6
RX_2: U$2.19 U$23.P$6
RX_3: U$26.19 U$37.P$6
RX_4: U$40.19 U$50.P$6
RX_5: U$53.19 U$63.P$6
RX_6: U$66.19 U$76.P$6
TIM1_CH1: U$1.18 U$12.P$4
TIM1_CH2: U$2.21 U$3.P$4
TIM1_CH3: U$2.18 U$10.P$4
TIM1_CH4: U$1.21 U$11.P$4
TIM1_CH5: U$26.21 U$27.P$4
TIM1_CH6: U$26.18 U$29.P$4
TIM1_CH7: U$40.21 U$41.P$4
TIM1_CH8: U$40.18 U$42.P$4
TIM1_CH9: U$53.21 U$54.P$4
TIM1_CH10: U$53.18 U$55.P$4
TIM1_CH11: U$66.21 U$67.P$4
TIM1_CH12: U$66.18 U$68.P$4
TX_1: U$1.20 U$18.P$5
TX_2: U$2.20 U$23.P$5
TX_3: U$26.20 U$37.P$5
TX_4: U$40.20 U$50.P$5
TX_5: U$53.20 U$63.P$5
TX_6: U$66.20 U$76.P$5
USART2_RX_1: U$1.27 U$18.P$2
USART2_RX_2: U$2.27 U$23.P$2
USART2_RX_3: U$26.27 U$37.P$2
USART2_RX_4: U$40.27 U$50.P$2
USART2_RX_5: U$53.27 U$63.P$2
USART2_RX_6: U$66.27 U$76.P$2
V_CORRIENTE_1: U$1.14 U$18.P$7
V_CORRIENTE_2: U$2.14 U$23.P$7
V_CORRIENTE_3: U$26.14 U$37.P$7
V_CORRIENTE_4: U$40.14 U$50.P$7
V_CORRIENTE_5: U$53.14 U$63.P$7
V_CORRIENTE_6: U$66.14 U$76.P$7
V_POT_1: U$1.13 U$15.P$1
V_POT_2: U$2.13 U$21.P$1
V_POT_3: U$26.13 U$35.P$1
V_POT_4: U$40.13 U$48.P$1
V_POT_5: U$53.13 U$61.P$1
V_POT_6: U$66.13 U$74.P$1
VBAT: R7.1 R8.2 U$1.15
VBAT1: R1.1 R2.2 U$2.15
VBAT2: R5.1 R6.2 U$26.15
VBAT3: R13.1 R14.2 U$40.15
VBAT4: R17.1 R18.2 U$53.15
VBAT5: R21.1 R22.2 U$66.15
VDD: C4.1 C5.1 U$1.5 U$5.2
VDD1: C9.1 C10.1 U$2.5 U$20.2
VDD2: C17.1 C18.1 U$26.5 U$34.2
VDD3: C24.1 C25.1 U$40.5 U$47.2
VDD4: C31.1 C32.1 U$53.5 U$60.2
VDD5: C38.1 C39.1 U$66.5 U$73.2

## Tracks (layer width: path | path; a pad name or v marks a point on that pad's centre or on a via)
+3V3_1  (via drill 0.5, 0.65, 0.7)
  Top 0.305: U$1.1 17.89,7.1 18.49,6.5 18.49,4.82 C2.1 | v13.51,13.49 13.46,13.44 12.92,13.44 12.4,12.92 C1.2 12.4,11.44 U$1.17
  Top 0.406: U$9.P$4 U$9.P$1 19.26,3.63 C6.1
  Top 0.61: C2.1
  Top 0.635: C3.2 18.33,2.96 v17.85,2.42
  Top 0.711: C2.1 C3.2 | v17.22,15.95 17.22,15.29 18.05,14.46 U$8.P$1
  Top 0.813: C6.1 19.07,2.42 v17.85,2.42
  Bottom 0.305: 21.4,8.82 U$5.1
  Bottom 0.406: 21.4,8.82 21.4,7.21 arc-90 U$16.P$1
  Bottom 0.61: 14.72,13.2 15.59,14.07 15.59,15.06 16.49,15.95 v17.22,15.95
  Bottom 0.813: 14.51,12.7 14.51,13.2 14.72,13.2 | 14.51,12.7 14.51,12.31 14.93,11.89 14.93,7.8 16.61,6.15 16.61,5.59 17.93,4.24 | 17.93,2.49 v17.85,2.42 | v13.51,13.49 14.3,12.7 14.51,12.7 | U$16.P$1 21.12,6.9
  Bottom 1.016: v17.85,2.42 21.12,5.73 21.12,6.9 | 17.93,4.24 17.93,2.49
  pour Bottom (isolate 0.254, rank 2): 22.33,2.61 22.33,14.14 19.61,16.99 11.61,16.99 11.12,16.5 11.12,12.87 13,10.99 13,6.95 15.47,4.49 15.47,2.13 16.66,0.93 19.58,0.93 21.26,2.61
+3V3_2  (via drill 0.5, 0.65, 0.7)
  Top 0.305: U$2.1 33.11,10.55 32.51,11.14 32.51,12.83 C7.1 | v37.49,4.16 37.54,4.21 38.08,4.21 38.6,4.73 C12.2 38.6,6.21 U$2.17
  Top 0.406: U$19.P$4 U$19.P$1 31.74,14.02 C11.1
  Top 0.61: C7.1
  Top 0.635: C8.2 32.67,14.69 v33.15,15.23
  Top 0.711: C7.1 C8.2 | v33.78,1.7 33.78,2.36 32.95,3.2 U$17.P$1
  Top 0.813: C11.1 31.93,15.23 v33.15,15.23
  Bottom 0.305: 29.6,8.83 U$20.1
  Bottom 0.406: 29.6,8.83 29.6,10.44 arc-90 U$22.P$1
  Bottom 0.61: 36.28,4.45 35.41,3.58 35.41,2.59 34.51,1.7 v33.78,1.7
  Bottom 0.813: 36.49,4.95 36.49,4.45 36.28,4.45 | 36.49,4.95 36.49,5.34 36.07,5.76 36.07,9.85 34.39,11.5 34.39,12.06 33.07,13.41 | 33.07,15.16 v33.15,15.23 | v37.49,4.16 36.7,4.95 36.49,4.95 | U$22.P$1 29.88,10.75
  Bottom 1.016: v33.15,15.23 29.88,11.92 29.88,10.75 | 33.07,13.41 33.07,15.16
  pour Bottom (isolate 0.254, rank 2): 28.75,15.04 28.75,3.51 31.39,0.66 39.39,0.66 39.88,1.15 39.88,4.78 38,6.66 38,10.7 35.53,13.16 35.53,15.52 34.34,16.72 31.42,16.72 29.74,15.04
+3V3_3  (via drill 0.5, 0.65, 0.7)
  Top 0.305: U$26.1 33.11,32.55 32.51,33.15 32.51,34.83 C14.1 | v37.49,26.16 37.54,26.21 38.08,26.21 38.6,26.73 C20.2 38.6,28.21 U$26.17
  Top 0.406: U$33.P$4 U$33.P$1 31.74,36.02 C19.1
  Top 0.61: C14.1
  Top 0.635: C15.2 32.67,36.69 v33.15,37.23
  Top 0.711: C14.1 C15.2 | v33.78,23.7 33.78,24.36 32.95,25.2 U$32.P$1
  Top 0.813: C19.1 31.93,37.23 v33.15,37.23
  Bottom 0.305: 29.6,30.83 U$34.1
  Bottom 0.406: 29.6,30.83 29.6,32.45 arc-90 U$36.P$1
  Bottom 0.61: 36.28,26.45 35.41,25.58 35.41,24.59 34.51,23.7 v33.78,23.7
  Bottom 0.813: 36.49,26.95 36.49,26.45 36.28,26.45 | 36.49,26.95 36.49,27.34 36.07,27.76 36.07,31.85 34.39,33.5 34.39,34.06 33.07,35.41 | 33.07,37.16 v33.15,37.23 | v37.49,26.16 36.7,26.95 36.49,26.95 | U$36.P$1 29.88,32.75
  Bottom 1.016: v33.15,37.23 29.88,33.92 29.88,32.75 | 33.07,35.41 33.07,37.16
  pour Bottom (isolate 0.254, rank 2): 28.75,37.04 28.75,25.31 31.39,22.66 39.39,22.66 39.88,23.15 39.88,26.78 38,28.66 38,32.7 35.53,35.16 35.53,37.52 34.34,38.72 31.42,38.72 29.74,37.04
+3V3_4  (via drill 0.5, 0.65, 0.7)
  Top 0.305: U$40.1 33.11,54.55 32.51,55.15 32.51,56.83 C22.1 | v37.49,48.16 37.54,48.21 38.08,48.21 38.6,48.73 C27.2 38.6,50.21 U$40.17
  Top 0.406: U$46.P$4 U$46.P$1 31.74,58.02 C26.1
  Top 0.61: C22.1
  Top 0.635: C23.2 32.67,58.69 v33.15,59.23
  Top 0.711: C22.1 C23.2 | v33.78,45.7 33.78,46.36 32.95,47.2 U$45.P$1
  Top 0.813: C26.1 31.93,59.23 v33.15,59.23
  Bottom 0.305: 29.6,52.83 U$47.1
  Bottom 0.406: 29.6,52.83 29.6,54.45 arc-90 U$49.P$1
  Bottom 0.61: 36.28,48.45 35.41,47.58 35.41,46.59 34.51,45.7 v33.78,45.7
  Bottom 0.813: 36.49,48.95 36.49,48.45 36.28,48.45 | 36.49,48.95 36.49,49.34 36.07,49.76 36.07,53.85 34.39,55.5 34.39,56.06 33.07,57.41 | 33.07,59.16 v33.15,59.23 | v37.49,48.16 36.7,48.95 36.49,48.95 | U$49.P$1 29.88,54.75
  Bottom 1.016: v33.15,59.23 29.88,55.92 29.88,54.75 | 33.07,57.41 33.07,59.16
  pour Bottom (isolate 0.254, rank 2): 28.75,59.04 28.75,47.31 31.39,44.66 39.39,44.66 39.88,45.15 39.88,48.78 38,50.66 38,54.7 35.53,57.16 35.53,59.52 34.34,60.72 31.42,60.72 29.74,59.04
+3V3_5  (via drill 0.5, 0.65, 0.7)
  Top 0.305: U$53.1 17.89,29.1 18.49,28.5 18.49,26.82 C29.1 | v13.51,35.49 13.46,35.44 12.92,35.44 12.4,34.92 C34.2 12.4,33.44 U$53.17
  Top 0.406: U$59.P$4 U$59.P$1 19.26,25.63 C33.1
  Top 0.61: C29.1
  Top 0.635: C30.2 18.33,24.96 v17.85,24.41
  Top 0.711: C29.1 C30.2 | v17.22,37.95 17.22,37.29 18.05,36.46 U$58.P$1
  Top 0.813: C33.1 19.07,24.41 v17.85,24.41
  Bottom 0.305: 21.4,30.82 U$60.1
  Bottom 0.406: 21.4,30.82 21.4,29.2 arc-90 U$62.P$1
  Bottom 0.61: 14.72,35.2 15.59,36.07 15.59,37.06 16.49,37.95 v17.22,37.95
  Bottom 0.813: 14.51,34.7 14.51,35.2 14.72,35.2 | 14.51,34.7 14.51,34.31 14.93,33.89 14.93,29.8 16.61,28.15 16.61,27.59 17.93,26.24 | 17.93,24.49 v17.85,24.41 | v13.51,35.49 14.3,34.7 14.51,34.7 | U$62.P$1 21.12,28.9
  Bottom 1.016: v17.85,24.41 21.12,27.73 21.12,28.9 | 17.93,26.24 17.93,24.49
  pour Bottom (isolate 0.254, rank 2): 22.25,24.61 22.25,36.34 19.61,38.99 11.61,38.99 11.12,38.5 11.12,34.87 13,32.99 13,28.95 15.47,26.49 15.47,24.13 16.66,22.93 19.58,22.93 21.26,24.61
+3V3_6  (via drill 0.5, 0.65, 0.7)
  Top 0.305: U$66.1 17.89,51.1 18.49,50.51 18.49,48.82 C36.1 | v13.51,57.49 13.46,57.44 12.92,57.44 12.4,56.92 C41.2 12.4,55.44 U$66.17
  Top 0.406: U$72.P$4 U$72.P$1 19.26,47.63 C40.1
  Top 0.61: C36.1
  Top 0.635: C37.2 18.33,46.96 v17.85,46.42
  Top 0.711: C36.1 C37.2 | v17.22,59.95 17.22,59.29 18.05,58.46 U$71.P$1
  Top 0.813: C40.1 19.07,46.42 v17.85,46.42
  Bottom 0.305: 21.4,52.82 U$73.1
  Bottom 0.406: 21.4,52.82 21.4,51.21 arc-90 U$75.P$1
  Bottom 0.61: 14.72,57.2 15.59,58.07 15.59,59.06 16.49,59.95 v17.22,59.95
  Bottom 0.813: 14.51,56.7 14.51,57.2 14.72,57.2 | 14.51,56.7 14.51,56.31 14.93,55.89 14.93,51.8 16.61,50.15 16.61,49.59 17.93,48.24 | 17.93,46.49 v17.85,46.42 | v13.51,57.49 14.3,56.7 14.51,56.7 | U$75.P$1 21.12,50.9
  Bottom 1.016: v17.85,46.42 21.12,49.73 21.12,50.9 | 17.93,48.24 17.93,46.49
  pour Bottom (isolate 0.254, rank 2): 22.25,46.61 22.25,58.34 19.61,60.99 11.61,60.99 11.12,60.5 11.12,56.87 13,54.99 13,50.95 15.47,48.49 15.47,46.13 16.66,44.93 19.58,44.93 21.26,46.61
+7V_1  (via drill 0.8)
  Top 0.762: 9.31,11.54 U$7.P$3
  Top 1.016: v8.48,12.19 9.31,11.54
  Top 1.143: v8.1,5.26 7.86,6.88 U$6.P$3
  Bottom 0.203: 6.09,12.17 7.18,11.1 7.18,10.36 7.15,10.56
  Bottom 0.254: 6.09,15.79 6.09,12.17
  Bottom 0.406: v8.48,12.19 8.3,12.25 | 6.09,15.79 R8.1 | 8.39,2.65 7.62,3.42 7.62,5.01 7.64,5.01 7.64,5.26 v8.1,5.26 | 7.56,14.46 arc90 7.14,14.04 7.14,13.51 arc60 7.57,12.77
  Bottom 0.559: U$11.P$6 8.39,2.65 | U$12.P$6 7.56,14.46
  Bottom 0.61: 7.57,12.77 arc-11 8.3,12.25
  Bottom 0.813: 7.92,10.72 8.45,11.25 8.43,11.28
  Bottom 1.27: v8.1,5.26 8.24,6.06 | 8.43,11.28 v8.48,12.19
  Bottom 1.524: 9.6,7.52 9.6,10.01 | U$18.P$4 5.41,8.9 6.45,9.83 7.15,10.56
  Bottom 1.676: 7.15,10.56 7.92,10.72 8.91,10.72 9.6,10.01 | 8.24,6.06 9.6,7.52
  pour Bottom (isolate 0.203): 10.39,2.25 12.22,4.08 12.22,11.47 8.46,15.23 6.7,15.23 3.94,12.47 3.94,7.51 6.53,4.92 6.53,3.63 6.53,3.02 7.59,1.95 10.08,1.95 10.36,2.23
+7V_2  (via drill 0.8)
  Top 0.762: 41.69,6.11 U$14.P$3
  Top 1.016: v42.52,5.46 41.69,6.11
  Top 1.143: v42.9,12.39 43.14,10.77 U$13.P$3
  Bottom 0.203: 44.91,5.48 43.82,6.55 43.82,7.29 43.85,7.09
  Bottom 0.254: 44.91,1.86 44.91,5.48
  Bottom 0.406: v42.52,5.46 42.7,5.4 | 44.91,1.86 R2.1 | 42.61,15 43.38,14.23 43.38,12.64 43.36,12.64 43.36,12.39 v42.9,12.39 | 43.44,3.19 arc90 43.86,3.61 43.86,4.14 arc60 43.43,4.88
  Bottom 0.559: U$3.P$6 42.61,15 | U$10.P$6 43.44,3.19
  Bottom 0.61: 43.43,4.88 arc-11 42.7,5.4
  Bottom 0.813: 43.08,6.93 42.55,6.4 42.57,6.37
  Bottom 1.27: v42.9,12.39 42.76,11.59 | 42.57,6.37 v42.52,5.46
  Bottom 1.524: 41.4,10.13 41.4,7.64 | U$23.P$4 45.59,8.75 44.55,7.82 43.85,7.09
  Bottom 1.676: 43.85,7.09 43.08,6.93 42.09,6.93 41.4,7.64 | 42.76,11.59 41.4,10.13
  pour Bottom (isolate 0.203): 40.61,15.4 38.78,13.57 38.78,6.17 42.54,2.42 44.3,2.42 47.06,5.18 47.06,10.14 44.47,12.73 44.47,14.02 44.47,14.63 43.41,15.7 40.92,15.7 40.64,15.42
+7V_3  (via drill 0.8)
  Top 0.762: 41.69,28.11 U$31.P$3
  Top 1.016: v42.52,27.46 41.69,28.11
  Top 1.143: v42.9,34.39 43.14,32.77 U$30.P$3
  Bottom 0.203: 44.91,27.48 43.82,28.55 43.82,29.29 43.85,29.09
  Bottom 0.254: 44.91,23.86 44.91,27.48
  Bottom 0.406: v42.52,27.46 42.7,27.4 | 44.91,23.86 R6.1 | 42.61,37 43.38,36.23 43.38,34.64 43.36,34.64 43.36,34.39 v42.9,34.39 | 43.44,25.19 arc90 43.86,25.61 43.86,26.14 arc60 43.43,26.88
  Bottom 0.559: U$27.P$6 42.61,37 | U$29.P$6 43.44,25.19
  Bottom 0.61: 43.43,26.88 arc-11 42.7,27.4
  Bottom 0.813: 43.08,28.93 42.55,28.4 42.57,28.37
  Bottom 1.27: v42.9,34.39 42.76,33.59 | 42.57,28.37 v42.52,27.46
  Bottom 1.524: 41.4,32.13 41.4,29.64 | U$37.P$4 45.59,30.75 44.55,29.82 43.85,29.09
  Bottom 1.676: 43.85,29.09 43.08,28.93 42.09,28.93 41.4,29.64 | 42.76,33.59 41.4,32.13
  pour Bottom (isolate 0.203): 40.61,37.4 38.78,35.57 38.78,28.18 42.54,24.42 44.3,24.42 47.06,27.18 47.06,32.14 44.47,34.73 44.47,36.02 44.47,36.63 43.41,37.7 40.92,37.7 40.64,37.42
+7V_4  (via drill 0.8)
  Top 0.762: 41.69,50.11 U$44.P$3
  Top 1.016: v42.52,49.46 41.69,50.11
  Top 1.143: v42.9,56.39 43.14,54.77 U$43.P$3
  Bottom 0.203: 44.91,49.48 43.82,50.55 43.82,51.29 43.85,51.09
  Bottom 0.254: 44.91,45.86 44.91,49.48
  Bottom 0.406: v42.52,49.46 42.7,49.4 | 44.91,45.86 R14.1 | 42.61,59 43.38,58.23 43.38,56.64 43.36,56.64 43.36,56.39 v42.9,56.39 | 43.44,47.19 arc90 43.86,47.61 43.86,48.14 arc60 43.43,48.88
  Bottom 0.559: U$41.P$6 42.61,59 | U$42.P$6 43.44,47.19
  Bottom 0.61: 43.43,48.88 arc-11 42.7,49.4
  Bottom 0.813: 43.08,50.93 42.55,50.4 42.57,50.37
  Bottom 1.27: v42.9,56.39 42.76,55.59 | 42.57,50.37 v42.52,49.46
  Bottom 1.524: 41.4,54.13 41.4,51.64 | U$50.P$4 45.59,52.75 44.55,51.82 43.85,51.09
  Bottom 1.676: 43.85,51.09 43.08,50.93 42.09,50.93 41.4,51.64 | 42.76,55.59 41.4,54.13
  pour Bottom (isolate 0.203): 40.61,59.4 38.78,57.57 38.78,50.18 42.54,46.42 44.3,46.42 47.06,49.18 47.06,54.14 44.47,56.73 44.47,58.02 44.47,58.63 43.41,59.7 40.92,59.7 40.64,59.42
+7V_5  (via drill 0.8)
  Top 0.762: 9.31,33.54 U$57.P$3
  Top 1.016: v8.48,34.19 9.31,33.54
  Top 1.143: v8.1,27.26 7.86,28.88 U$56.P$3
  Bottom 0.203: 6.09,34.17 7.18,33.1 7.18,32.37 7.15,32.56
  Bottom 0.254: 6.09,37.79 6.09,34.17
  Bottom 0.406: v8.48,34.19 8.3,34.25 | 6.09,37.79 R18.1 | 8.39,24.65 7.62,25.42 7.62,27.01 7.64,27.01 7.64,27.26 v8.1,27.26 | 7.56,36.46 arc90 7.14,36.04 7.14,35.51 arc60 7.57,34.77
  Bottom 0.559: U$54.P$6 8.39,24.65 | U$55.P$6 7.56,36.46
  Bottom 0.61: 7.57,34.77 arc-11 8.3,34.25
  Bottom 0.813: 7.92,32.72 8.45,33.25 8.43,33.28
  Bottom 1.27: v8.1,27.26 8.24,28.06 | 8.43,33.28 v8.48,34.19
  Bottom 1.524: 9.6,29.52 9.6,32.01 | U$63.P$4 5.41,30.9 6.45,31.83 7.15,32.56
  Bottom 1.676: 7.15,32.56 7.92,32.72 8.91,32.72 9.6,32.01 | 8.24,28.06 9.6,29.52
  pour Bottom (isolate 0.203): 10.39,24.25 12.22,26.08 12.22,33.48 8.46,37.23 6.7,37.23 3.94,34.47 3.94,29.51 6.53,26.92 6.53,25.63 6.53,25.02 7.59,23.95 10.08,23.95 10.36,24.23
+7V_6  (via drill 0.8)
  Top 0.762: 9.31,55.54 U$70.P$3
  Top 1.016: v8.48,56.19 9.31,55.54
  Top 1.143: v8.1,49.26 7.86,50.88 U$69.P$3
  Bottom 0.203: 6.09,56.17 7.18,55.1 7.18,54.37 7.15,54.56
  Bottom 0.254: 6.09,59.79 6.09,56.17
  Bottom 0.406: v8.48,56.19 8.3,56.25 | 6.09,59.79 R22.1 | 8.39,46.65 7.62,47.42 7.62,49.01 7.64,49.01 7.64,49.26 v8.1,49.26 | 7.56,58.46 arc90 7.14,58.04 7.14,57.51 arc60 7.57,56.77
  Bottom 0.559: U$67.P$6 8.39,46.65 | U$68.P$6 7.56,58.46
  Bottom 0.61: 7.57,56.77 arc-11 8.3,56.25
  Bottom 0.813: 7.92,54.72 8.45,55.25 8.43,55.28
  Bottom 1.27: v8.1,49.26 8.24,50.06 | 8.43,55.28 v8.48,56.19
  Bottom 1.524: 9.6,51.52 9.6,54.01 | U$76.P$4 5.41,52.9 6.45,53.83 7.15,54.56
  Bottom 1.676: 7.15,54.56 7.92,54.72 8.91,54.72 9.6,54.01 | 8.24,50.06 9.6,51.52
  pour Bottom (isolate 0.203): 10.39,46.25 12.22,48.08 12.22,55.48 8.46,59.23 6.7,59.23 3.94,56.47 3.94,51.51 6.53,48.92 6.53,47.63 6.53,47.02 7.59,45.95 10.08,45.95 10.36,46.23
EN_Q1  (via drill 0.35)
  Top 0.305: U$1.25 13.79,6.07 13.79,5.31 v13.79,5.11 | R9.2 12.26,3.94 11.04,5.16 v10.54,5.16
  Bottom 0.305: U$11.P$8 9.24,4 10.4,5.16 v10.54,5.16 10.9,4.79 11.38,4.79 | v13.79,5.11 13.47,4.79 12.95,4.79 11.38,4.79 | U$11.P$1 12.04,4.13 11.38,4.79
EN_Q2  (via drill 0.35)
  Top 0.305: U$1.22 12.28,8.15 v12.11,7.98
  Bottom 0.203: U$12.P$8 7.97,16.08 8.17,16.28 10.28,16.28 10.62,15.94 U$12.P$1
  Bottom 0.305: v12.11,7.98 13.33,7.98 14.17,8.79 14.17,11.43 12.75,12.85 12.75,15.07 R10.1 12.38,15.44 12.21,15.44 11.91,15.75 10.63,15.75 U$12.P$1
EN_Q3  (via drill 0.35)
  Top 0.305: U$2.25 37.21,11.58 37.21,12.34 v37.21,12.54 | R3.2 38.74,13.71 39.95,12.49 v40.46,12.49
  Bottom 0.305: U$3.P$8 41.76,13.65 40.6,12.49 v40.46,12.49 40.1,12.85 39.62,12.85 | v37.21,12.54 37.52,12.85 38.05,12.85 39.62,12.85 | U$3.P$1 38.96,13.51 39.62,12.85
EN_Q4  (via drill 0.35)
  Top 0.305: U$2.22 38.72,9.5 v38.89,9.67
  Bottom 0.203: U$10.P$8 43.03,1.57 42.83,1.37 40.72,1.37 40.38,1.71 U$10.P$1
  Bottom 0.305: v38.89,9.67 37.67,9.67 36.83,8.86 36.83,6.22 38.25,4.79 38.25,2.58 R4.1 38.62,2.21 38.79,2.21 39.09,1.9 40.37,1.9 U$10.P$1
EN_Q5  (via drill 0.35)
  Top 0.305: U$26.25 37.21,33.58 37.21,34.34 v37.21,34.54 | R11.2 38.74,35.71 39.95,34.49 v40.46,34.49
  Bottom 0.305: U$27.P$8 41.76,35.65 40.6,34.49 v40.46,34.49 40.1,34.86 39.62,34.86 | v37.21,34.54 37.52,34.86 38.05,34.86 39.62,34.86 | U$27.P$1 38.96,35.52 39.62,34.86
EN_Q6  (via drill 0.35)
  Top 0.305: U$26.22 38.72,31.5 v38.89,31.67
  Bottom 0.203: U$29.P$8 43.03,23.57 42.83,23.37 40.72,23.37 40.38,23.71 U$29.P$1
  Bottom 0.305: v38.89,31.67 37.67,31.67 36.83,30.86 36.83,28.22 38.25,26.79 38.25,24.57 R12.1 38.62,24.2 38.79,24.2 39.09,23.9 40.37,23.9 U$29.P$1
EN_Q7  (via drill 0.35)
  Top 0.305: U$40.25 37.21,55.58 37.21,56.34 v37.21,56.54 | R15.2 38.74,57.71 39.95,56.49 v40.46,56.49
  Bottom 0.305: U$41.P$8 41.76,57.65 40.6,56.49 v40.46,56.49 40.1,56.86 39.62,56.86 | v37.21,56.54 37.52,56.86 38.05,56.86 39.62,56.86 | U$41.P$1 38.96,57.52 39.62,56.86
EN_Q8  (via drill 0.35)
  Top 0.305: U$40.22 38.72,53.5 v38.89,53.67
  Bottom 0.203: U$42.P$8 43.03,45.57 42.83,45.37 40.72,45.37 40.38,45.71 U$42.P$1
  Bottom 0.305: v38.89,53.67 37.67,53.67 36.83,52.86 36.83,50.22 38.25,48.8 38.25,46.58 R16.1 38.62,46.21 38.79,46.21 39.09,45.9 40.37,45.9 U$42.P$1
EN_Q9  (via drill 0.35)
  Top 0.305: U$53.25 13.79,28.07 13.79,27.31 v13.79,27.11 | R19.2 12.26,25.94 11.04,27.16 v10.54,27.16
  Bottom 0.305: U$54.P$8 9.24,26 10.4,27.16 v10.54,27.16 10.9,26.79 11.38,26.79 | v13.79,27.11 13.47,26.79 12.95,26.79 11.38,26.79 | U$54.P$1 12.04,26.13 11.38,26.79
EN_Q10  (via drill 0.35)
  Top 0.305: U$53.22 12.28,30.15 v12.11,29.98
  Bottom 0.203: U$55.P$8 7.97,38.08 8.17,38.28 10.28,38.28 10.62,37.94 U$55.P$1
  Bottom 0.305: v12.11,29.98 13.33,29.98 14.17,30.79 14.17,33.43 12.75,34.86 12.75,37.08 R20.1 12.38,37.45 12.21,37.45 11.91,37.75 10.63,37.75 U$55.P$1
EN_Q11  (via drill 0.35)
  Top 0.305: U$66.25 13.79,50.07 13.79,49.31 v13.79,49.11 | R23.2 12.26,47.94 11.04,49.16 v10.54,49.16
  Bottom 0.305: U$67.P$8 9.24,48 10.4,49.16 v10.54,49.16 10.9,48.8 11.38,48.8 | v13.79,49.11 13.47,48.8 12.95,48.8 11.38,48.8 | U$67.P$1 12.04,48.14 11.38,48.8
EN_Q12  (via drill 0.35)
  Top 0.305: U$66.22 12.28,52.15 v12.11,51.98
  Bottom 0.203: U$68.P$8 7.97,60.08 8.17,60.28 10.28,60.28 10.62,59.94 U$68.P$1
  Bottom 0.305: v12.11,51.98 13.33,51.98 14.17,52.79 14.17,55.43 12.75,56.86 12.75,59.08 R24.1 12.38,59.45 12.21,59.45 11.91,59.75 10.63,59.75 U$68.P$1
EN_SERIAL_1  (via drill 0.35)
  Top 0.254: U$1.28 15.29,5.99 arc65 14.95,5.31 arc40 15.11,4.87 15.31,4.54 arc43 v16.18,3.89
  Bottom 0.203: U$18.P$1 6.93,1.02 15.49,1.02 16.02,1.55 16.02,3.74 v16.18,3.89
EN_SERIAL_2  (via drill 0.35)
  Top 0.254: U$2.28 35.71,11.66 arc65 36.05,12.34 arc40 35.89,12.78 35.69,13.1 arc43 v34.83,13.76
  Bottom 0.203: U$23.P$1 44.07,16.63 35.51,16.63 34.98,16.1 34.98,13.91 v34.83,13.76
EN_SERIAL_3  (via drill 0.35)
  Top 0.254: U$26.28 35.71,33.66 arc65 36.05,34.34 arc40 35.89,34.78 35.69,35.11 arc43 v34.83,35.76
  Bottom 0.203: U$37.P$1 44.07,38.63 35.51,38.63 34.98,38.1 34.98,35.91 v34.83,35.76
EN_SERIAL_4  (via drill 0.35)
  Top 0.254: U$40.28 35.71,55.66 arc65 36.05,56.34 arc40 35.89,56.78 35.69,57.11 arc43 v34.83,57.76
  Bottom 0.203: U$50.P$1 44.07,60.63 35.51,60.63 34.98,60.1 34.98,57.91 v34.83,57.76
EN_SERIAL_5  (via drill 0.35)
  Top 0.254: U$53.28 15.29,27.99 arc65 14.95,27.31 arc40 15.11,26.87 15.31,26.54 arc43 v16.18,25.89
  Bottom 0.203: U$63.P$1 6.93,23.02 15.49,23.02 16.02,23.55 16.02,25.74 v16.18,25.89
EN_SERIAL_6  (via drill 0.35)
  Top 0.254: U$66.28 15.29,49.99 arc65 14.95,49.31 arc40 15.11,48.87 15.31,48.55 arc43 v16.18,47.89
  Bottom 0.203: U$76.P$1 6.93,45.02 15.49,45.02 16.02,45.55 16.02,47.74 v16.18,47.89
GND_1  (via drill 0.35, 0.4, 0.5, 0.65, 0.8)
  Top 0.254: 12.69,2.19 12.75,2.24 12.75,2.31 | 6.15,8.35 7.21,8.79
  Top 0.305: v11.58,13.64 12.29,13.64 13.08,14.43 v13.74,14.43 14.24,13.92 14.24,13.13 13.7,12.59 C1.1 13.79,12.33 U$1.16 | v17.83,5.72 17.29,6.28 U$1.32 17.29,6.13 17.37,6.05 17.14,5.82 17.14,5.31 | 17.14,5.31 17.14,4.77 C2.2 | U$1.31 16.79,5.66 17.14,5.31
  Top 0.406: U$9.P$2 21.4,3.55 C6.2 20.56,2.18 20.07,1.59 arc-50 18.9,1.11 16.79,1.11 16.71,1.2 16.71,1.3 | C3.1 17.01,3.7 17.01,3.19 15.62,1.8 15.62,1.27 | 10.4,8.4 10.92,8.79 v10.94,8.84 | 6.52,4.75 6.12,5.57 U$18.P$3 6.15,8.35 | 14.71,1.27 14.71,1.94 v14.88,2.11 | v16.99,1.59 16.99,1.58 16.68,1.27
  Top 0.61: C2.2 C3.1 | 12.75,2.31 R9.1
  Top 0.711: 16.71,1.3 16.68,1.27 15.62,1.27 14.71,1.27 13.55,1.27 12.69,2.13 12.69,2.19 10.96,3.91 8.12,3.91 7.59,4.07 6.52,4.75
  Top 0.762: 10.4,8.4 U$6.P$1
  Top 1.016: 9.88,8.79 10.4,8.4
  Top 1.27: 6.77,9.46 U$7.P$1
  Top 1.422: 9.88,8.79 v7.87,8.79 7.21,8.79 6.77,9.46
  Bottom 0.254: v17.83,5.72 17.67,5.84 17.67,6.28 17.35,6.6 | 17.35,6.6 15.82,8.13 15.82,8.53 15.85,8.53 15.98,8.66 15.98,8.72 SJ2.1 | C16.2 17.35,7.38 17.35,6.6
  Bottom 0.305: R10.2 13.74,15.3 | 13.74,15.3 13.74,15.58 R7.2 | 13.74,15.3 v13.74,14.43
  Bottom 0.406: v10.94,8.84 11.73,9.58 12.64,9.58 13.1,10.04 13.1,10.95 11.58,12.47 v11.58,13.64 11.58,14.05 11.17,14.46 U$12.P$3 | U$11.P$3 13.45,2.65 13.66,2.86 14.3,2.86 14.88,2.29 v14.88,2.11
  Bottom 0.61: SJ1.1 15.94,9.48 SJ2.1
  Bottom 1.27: U$18.P$3 5.13,6.91
  Bottom 1.524: 7.79,8.56 v7.87,8.79
  Bottom 1.676: 7.79,8.56 6.17,6.91 5.13,6.91
  pour Top (isolate 0.254): 22.45,2.74 22.45,5.84 22.12,6.17 18.87,6.17 18.44,6.6 17.8,7.23 15.57,7.23 13.89,5.56 13.21,5.56 12.06,6.7 12.06,9.72 10.08,11.7 5.69,11.7 4.16,10.18 4.16,7.92 3.71,6.12 3.71,4.72 6.17,2.25 7.62,0.81 14.55,0.81 19.84,0.81 21.61,2.58 22.33,2.58 22.45,2.71
GND_2  (via drill 0.35, 0.4, 0.5, 0.65, 0.8)
  Top 0.254: 38.31,15.46 38.25,15.41 38.25,15.34 | 44.85,9.3 43.79,8.86
  Top 0.305: v39.42,4.01 38.71,4.01 37.92,3.22 v37.26,3.22 36.76,3.73 36.76,4.52 37.3,5.06 C12.1 37.21,5.32 U$2.16 | v33.17,11.93 33.71,11.37 U$2.32 33.71,11.52 33.63,11.6 33.86,11.83 33.86,12.34 | 33.86,12.34 33.86,12.88 C7.2 | U$2.31 34.21,11.99 33.86,12.34
  Top 0.406: U$19.P$2 29.6,14.1 C11.2 30.44,15.47 30.93,16.06 arc-50 32.1,16.54 34.21,16.54 34.29,16.45 34.29,16.35 | C8.1 33.99,13.95 33.99,14.46 35.38,15.85 35.38,16.38 | 40.6,9.25 40.08,8.86 v40.06,8.81 | 44.48,12.9 44.88,12.08 U$23.P$3 44.85,9.3 | 36.29,16.38 36.29,15.71 v36.12,15.54 | v34.01,16.06 34.01,16.07 34.32,16.38
  Top 0.61: C7.2 C8.1 | 38.25,15.34 R3.1
  Top 0.711: 34.29,16.35 34.32,16.38 35.38,16.38 36.29,16.38 37.45,16.38 38.31,15.52 38.31,15.46 40.04,13.74 42.88,13.74 43.41,13.58 44.48,12.9
  Top 0.762: 40.6,9.25 U$13.P$1
  Top 1.016: 41.12,8.86 40.6,9.25
  Top 1.27: 44.23,8.19 U$14.P$1
  Top 1.422: 41.12,8.86 v43.13,8.86 43.79,8.86 44.23,8.19
  Bottom 0.254: v33.17,11.93 33.33,11.81 33.33,11.37 33.65,11.05 | 33.65,11.05 35.18,9.52 35.18,9.12 35.15,9.12 35.02,8.99 35.02,8.93 SJ4.1 | C13.2 33.65,10.27 33.65,11.05
  Bottom 0.305: R4.2 37.26,2.35 | 37.26,2.35 37.26,2.07 R1.2 | 37.26,2.35 v37.26,3.22
  Bottom 0.406: v40.06,8.81 39.27,8.07 38.35,8.07 37.9,7.62 37.9,6.7 39.42,5.18 v39.42,4.01 39.42,3.6 39.83,3.19 U$10.P$3 | U$3.P$3 37.55,15 37.34,14.79 36.7,14.79 36.12,15.36 v36.12,15.54
  Bottom 0.61: SJ3.1 35.06,8.17 SJ4.1
  Bottom 1.27: U$23.P$3 45.94,10.74 45.87,10.74
  Bottom 1.524: 43.21,9.09 v43.13,8.86
  Bottom 1.676: 43.21,9.09 44.83,10.74 45.87,10.74
  pour Top (isolate 0.254): 28.55,14.91 28.55,11.81 28.88,11.48 32.13,11.48 32.56,11.05 33.2,10.42 35.43,10.42 37.11,12.09 37.79,12.09 38.94,10.95 38.94,7.93 40.92,5.95 45.31,5.95 46.84,7.47 46.84,9.73 47.29,11.53 47.29,12.93 44.83,15.4 43.38,16.84 36.45,16.84 31.16,16.84 29.39,15.06 28.67,15.06 28.55,14.94
GND_3  (via drill 0.35, 0.4, 0.5, 0.65, 0.8)
  Top 0.254: 38.31,37.47 38.25,37.41 38.25,37.34 | 44.85,31.3 43.79,30.86
  Top 0.305: v39.42,26.01 38.71,26.01 37.92,25.22 v37.26,25.22 36.76,25.73 36.76,26.52 37.3,27.06 C20.1 37.21,27.32 U$26.16 | v33.17,33.93 33.71,33.37 U$26.32 33.71,33.52 33.63,33.6 33.86,33.83 33.86,34.34 | 33.86,34.34 33.86,34.88 C14.2 | U$26.31 34.21,33.99 33.86,34.34
  Top 0.406: U$33.P$2 29.6,36.1 C19.2 30.44,37.47 30.93,38.06 arc-50 32.1,38.54 34.21,38.54 34.29,38.45 34.29,38.35 | C15.1 33.99,35.95 33.99,36.46 35.38,37.85 35.38,38.38 | 40.6,31.25 40.08,30.86 v40.06,30.81 | 44.48,34.9 44.88,34.09 U$37.P$3 44.85,31.3 | 36.29,38.38 36.29,37.71 v36.12,37.54 | v34.01,38.06 34.01,38.07 34.32,38.38
  Top 0.61: C14.2 C15.1 | 38.25,37.34 R11.1
  Top 0.711: 34.29,38.35 34.32,38.38 35.38,38.38 36.29,38.38 37.45,38.38 38.31,37.52 38.31,37.47 40.04,35.74 42.88,35.74 43.41,35.58 44.48,34.9
  Top 0.762: 40.6,31.25 U$30.P$1
  Top 1.016: 41.12,30.86 40.6,31.25
  Top 1.27: 44.23,30.19 U$31.P$1
  Top 1.422: 41.12,30.86 v43.13,30.86 43.79,30.86 44.23,30.19
  Bottom 0.254: v33.17,33.93 33.33,33.81 33.33,33.37 33.65,33.05 | 33.65,33.05 35.18,31.52 35.18,31.12 35.15,31.12 35.02,30.99 35.02,30.93 SJ6.1 | C21.2 33.65,32.27 33.65,33.05
  Bottom 0.305: R12.2 37.26,24.35 | 37.26,24.35 37.26,24.07 R5.2 | 37.26,24.35 v37.26,25.22
  Bottom 0.406: v40.06,30.81 39.27,30.07 38.35,30.07 37.9,29.61 37.9,28.7 39.42,27.18 v39.42,26.01 39.42,25.6 39.83,25.19 U$29.P$3 | U$27.P$3 37.55,37 37.34,36.79 36.7,36.79 36.12,37.36 v36.12,37.54
  Bottom 0.61: SJ5.1 35.06,30.17 SJ6.1
  Bottom 1.27: U$37.P$3 45.87,32.74
  Bottom 1.524: 43.21,31.09 v43.13,30.86
  Bottom 1.676: 43.21,31.09 44.83,32.74 45.87,32.74
  pour Top (isolate 0.254): 28.55,36.94 28.55,33.81 28.88,33.48 32.13,33.48 33.2,32.42 35.43,32.42 37.11,34.09 37.79,34.09 38.94,32.95 38.94,29.93 40.92,27.95 45.31,27.95 46.84,29.47 46.84,31.73 47.29,33.53 47.29,34.93 43.56,38.67 36.45,38.67 36.45,38.84 31.16,38.84 29.39,37.07 28.67,37.07
GND_4  (via drill 0.35, 0.4, 0.5, 0.65, 0.8)
  Top 0.254: 38.31,59.47 38.25,59.41 38.25,59.34 | 44.85,53.3 43.79,52.86
  Top 0.305: v39.42,48.01 38.71,48.01 37.92,47.22 v37.26,47.22 36.76,47.73 36.76,48.52 37.3,49.06 C27.1 37.21,49.32 U$40.16 | v33.17,55.93 33.71,55.37 U$40.32 33.71,55.52 33.63,55.6 33.86,55.83 33.86,56.34 | 33.86,56.34 33.86,56.88 C22.2 | U$40.31 34.21,55.99 33.86,56.34
  Top 0.406: U$46.P$2 29.6,58.1 C26.2 30.44,59.47 30.93,60.06 arc-50 32.1,60.54 34.21,60.54 34.29,60.45 34.29,60.35 | C23.1 33.99,57.95 33.99,58.46 35.38,59.85 35.38,60.38 | 40.6,53.25 40.08,52.86 v40.06,52.81 | 44.48,56.9 44.88,56.09 U$50.P$3 44.85,53.3 | 36.29,60.38 36.29,59.71 v36.12,59.54 | v34.01,60.06 34.01,60.07 34.32,60.38
  Top 0.61: C22.2 C23.1 | 38.25,59.34 R15.1
  Top 0.711: 34.29,60.35 34.32,60.38 35.38,60.38 36.29,60.38 37.45,60.38 38.31,59.52 38.31,59.47 40.04,57.74 42.88,57.74 43.41,57.58 44.48,56.9
  Top 0.762: 40.6,53.25 U$43.P$1
  Top 1.016: 41.12,52.86 40.6,53.25
  Top 1.27: 44.23,52.19 U$44.P$1
  Top 1.422: 41.12,52.86 v43.13,52.86 43.79,52.86 44.23,52.19
  Bottom 0.254: v33.17,55.93 33.33,55.81 33.33,55.37 33.65,55.05 | 33.65,55.05 35.18,53.52 35.18,53.12 35.15,53.12 35.02,52.99 35.02,52.93 SJ8.1 | C28.2 33.65,54.27 33.65,55.05
  Bottom 0.305: R16.2 37.26,46.35 | 37.26,46.35 37.26,46.07 R13.2 | 37.26,46.35 v37.26,47.22
  Bottom 0.406: v40.06,52.81 39.27,52.07 38.35,52.07 37.9,51.62 37.9,50.7 39.42,49.18 v39.42,48.01 39.42,47.6 39.83,47.19 U$42.P$3 | U$41.P$3 37.55,59 37.34,58.79 36.7,58.79 36.12,59.36 v36.12,59.54
  Bottom 0.61: SJ7.1 35.06,52.17 SJ8.1
  Bottom 1.27: U$50.P$3 45.87,54.74
  Bottom 1.524: 43.21,53.09 v43.13,52.86
  Bottom 1.676: 43.21,53.09 44.83,54.74 45.87,54.74
  pour Top (isolate 0.254): 28.55,58.91 28.55,55.81 28.88,55.48 32.13,55.48 32.56,55.05 33.2,54.42 35.43,54.42 37.11,56.09 37.79,56.09 38.94,54.95 38.94,51.93 40.92,49.95 45.31,49.95 46.84,51.47 46.84,53.73 47.29,55.53 47.29,56.93 44.83,59.4 43.38,60.84 36.45,60.84 31.16,60.84 29.39,59.07 28.67,59.07 28.55,58.94
GND_5  (via drill 0.35, 0.4, 0.5, 0.65, 0.8)
  Top 0.254: 12.69,24.18 12.75,24.24 12.75,24.31 | 6.15,30.35 7.21,30.79
  Top 0.305: v11.58,35.64 12.29,35.64 13.08,36.43 v13.74,36.43 14.24,35.92 14.24,35.13 13.7,34.59 C34.1 13.79,34.33 U$53.16 | v17.83,27.72 17.29,28.28 U$53.32 17.29,28.13 17.37,28.05 17.14,27.82 17.14,27.31 | 17.14,27.31 17.14,26.77 C29.2 | U$53.31 16.79,27.66 17.14,27.31
  Top 0.406: U$59.P$2 21.4,25.55 C33.2 20.56,24.18 20.07,23.59 arc-50 18.9,23.11 16.79,23.11 16.71,23.2 16.71,23.3 | C30.1 17.01,25.7 17.01,25.19 15.62,23.8 15.62,23.27 | 10.4,30.4 10.92,30.79 v10.94,30.84 | 6.52,26.75 6.12,27.56 U$63.P$3 6.15,30.35 | 14.71,23.27 14.71,23.94 v14.88,24.11 | v16.99,23.59 16.99,23.58 16.68,23.27
  Top 0.61: C29.2 C30.1 | 12.75,24.31 R19.1
  Top 0.711: 16.71,23.3 16.68,23.27 15.62,23.27 14.71,23.27 13.55,23.27 12.69,24.13 12.69,24.18 10.96,25.91 8.12,25.91 7.59,26.07 6.52,26.75
  Top 0.762: 10.4,30.4 U$56.P$1
  Top 1.016: 9.88,30.79 10.4,30.4
  Top 1.27: 6.77,31.46 U$57.P$1
  Top 1.422: 9.88,30.79 v7.87,30.79 7.21,30.79 6.77,31.46
  Bottom 0.254: v17.83,27.72 17.67,27.84 17.67,28.28 17.35,28.6 | 17.35,28.6 15.82,30.13 15.82,30.53 15.85,30.53 15.98,30.66 15.98,30.72 SJ10.1 | C35.2 17.35,29.38 17.35,28.6
  Bottom 0.305: R20.2 13.74,37.3 | 13.74,37.3 13.74,37.58 R17.2 | 13.74,37.3 v13.74,36.43
  Bottom 0.406: v10.94,30.84 11.73,31.58 12.64,31.58 13.1,32.04 13.1,32.95 11.58,34.47 v11.58,35.64 11.58,36.05 11.17,36.46 U$55.P$3 | U$54.P$3 13.45,24.65 13.66,24.86 14.3,24.86 14.88,24.29 v14.88,24.11
  Bottom 0.61: SJ9.1 15.94,31.48 SJ10.1
  Bottom 1.27: U$63.P$3 5.06,28.91 5.13,28.91
  Bottom 1.524: 7.79,30.56 v7.87,30.79
  Bottom 1.676: 7.79,30.56 6.17,28.91 5.13,28.91
  pour Top (isolate 0.254): 22.45,24.71 22.45,27.84 22.12,28.17 18.87,28.17 17.8,29.23 15.57,29.23 13.89,27.56 13.21,27.56 12.06,28.7 12.06,31.72 10.08,33.7 5.69,33.7 4.16,32.18 4.16,29.92 3.71,28.12 3.71,26.72 7.42,23.01 14.55,23.01 14.55,22.81 19.84,22.81 21.61,24.59 22.33,24.59
GND_6  (via drill 0.35, 0.4, 0.5, 0.65, 0.8)
  Top 0.254: 12.69,46.19 12.75,46.24 12.75,46.31 | 6.15,52.35 7.21,52.79
  Top 0.305: v11.58,57.64 12.29,57.64 13.08,58.43 v13.74,58.43 14.24,57.92 14.24,57.13 13.7,56.59 C41.1 13.79,56.33 U$66.16 | v17.83,49.72 17.29,50.28 U$66.32 17.29,50.13 17.37,50.05 17.14,49.82 17.14,49.31 | 17.14,49.31 17.14,48.77 C36.2 | U$66.31 16.79,49.66 17.14,49.31
  Top 0.406: U$72.P$2 21.4,47.55 C40.2 20.56,46.18 20.07,45.59 arc-50 18.9,45.11 16.79,45.11 16.71,45.2 16.71,45.3 | C37.1 17.01,47.7 17.01,47.19 15.62,45.8 15.62,45.27 | 10.4,52.4 10.92,52.79 v10.94,52.84 | 6.52,48.75 6.12,49.57 U$76.P$3 6.15,52.35 | 14.71,45.27 14.71,45.94 v14.88,46.11 | v16.99,45.59 16.99,45.58 16.68,45.27
  Top 0.61: C36.2 C37.1 | 12.75,46.31 R23.1
  Top 0.711: 16.71,45.3 16.68,45.27 15.62,45.27 14.71,45.27 13.55,45.27 12.69,46.13 12.69,46.19 10.96,47.91 8.12,47.91 7.59,48.07 6.52,48.75
  Top 0.762: 10.4,52.4 U$69.P$1
  Top 1.016: 9.88,52.79 10.4,52.4
  Top 1.27: 6.77,53.46 U$70.P$1
  Top 1.422: 9.88,52.79 v7.87,52.79 7.21,52.79 6.77,53.46
  Bottom 0.254: v17.83,49.72 17.67,49.84 17.67,50.28 17.35,50.6 | 17.35,50.6 15.82,52.13 15.82,52.53 15.85,52.53 15.98,52.66 15.98,52.72 SJ12.1 | C42.2 17.35,51.38 17.35,50.6
  Bottom 0.305: R24.2 13.74,59.3 | 13.74,59.3 13.74,59.58 R21.2 | 13.74,59.3 v13.74,58.43
  Bottom 0.406: v10.94,52.84 11.73,53.58 12.64,53.58 13.1,54.04 13.1,54.95 11.58,56.47 v11.58,57.64 11.58,58.05 11.17,58.46 U$68.P$3 | U$67.P$3 13.45,46.65 13.66,46.86 14.3,46.86 14.88,46.29 v14.88,46.11
  Bottom 0.61: SJ11.1 15.94,53.48 SJ12.1
  Bottom 1.27: U$76.P$3 5.13,50.91
  Bottom 1.524: 7.79,52.56 v7.87,52.79
  Bottom 1.676: 7.79,52.56 6.17,50.91 5.13,50.91
  pour Top (isolate 0.254): 22.45,46.71 22.45,49.84 22.12,50.17 18.87,50.17 17.8,51.23 15.57,51.23 13.89,49.56 13.21,49.56 12.06,50.7 12.06,53.72 10.08,55.7 5.69,55.7 4.16,54.18 4.16,51.92 3.71,50.12 3.71,48.72 7.39,45.04 14.55,45.04 14.55,44.81 19.84,44.81 21.61,46.59 22.33,46.59
GNDA  (via drill 0.4)
  Top 0.305: C5.2 C4.2 20.37,9.47 19.56,9.47 19.47,9.52 v19.4,9.45 19.22,9.45 19.02,9.65 U$1.6
  Bottom 0.61: SJ1.2 17.97,9.53 19.32,9.53 v19.4,9.45
GNDA1  (via drill 0.4)
  Top 0.305: C10.2 C9.2 30.63,8.18 31.44,8.18 31.53,8.13 v31.6,8.2 31.78,8.2 31.98,8 U$2.6
  Bottom 0.61: SJ3.2 33.03,8.12 31.67,8.12 v31.6,8.2
GNDA2  (via drill 0.4)
  Top 0.305: C18.2 C17.2 30.63,30.18 31.44,30.18 31.53,30.13 v31.6,30.2 31.78,30.2 31.98,30 U$26.6
  Bottom 0.61: SJ5.2 33.03,30.12 31.67,30.12 v31.6,30.2
GNDA3  (via drill 0.4)
  Top 0.305: C25.2 C24.2 30.63,52.18 31.44,52.18 31.53,52.13 v31.6,52.2 31.78,52.2 31.98,52 U$40.6
  Bottom 0.61: SJ7.2 33.03,52.12 31.67,52.12 v31.6,52.2
GNDA4  (via drill 0.4)
  Top 0.305: C32.2 C31.2 20.37,31.47 19.56,31.47 19.47,31.52 v19.4,31.45 19.22,31.45 19.02,31.65 U$53.6
  Bottom 0.61: SJ9.2 17.97,31.53 19.32,31.53 v19.4,31.45
GNDA5  (via drill 0.4)
  Top 0.305: C39.2 C38.2 20.37,53.47 19.56,53.47 19.47,53.52 v19.4,53.45 19.22,53.45 19.02,53.65 U$66.6
  Bottom 0.61: SJ11.2 17.97,53.53 19.32,53.53 v19.4,53.45
JTCK  (via drill 0.65)
  Top 0.305: U$1.24 13.19,6.31 12.9,6.1 v12.9,5.72
JTCK1  (via drill 0.65)
  Top 0.305: U$2.24 37.81,11.34 38.1,11.55 v38.1,11.93
JTCK2  (via drill 0.65)
  Top 0.305: U$26.24 37.81,33.34 38.1,33.55 v38.1,33.93
JTCK3  (via drill 0.65)
  Top 0.305: U$40.24 37.81,55.34 38.1,55.55 v38.1,55.93
JTCK4  (via drill 0.65)
  Top 0.305: U$53.24 13.19,28.31 12.9,28.1 v12.9,27.72
JTCK5  (via drill 0.65)
  Top 0.305: U$66.24 13.19,50.31 12.9,50.1 v12.9,49.72
JTMS  (via drill 0.65)
  Top 0.254: U$1.23 12.75,7.65 12.06,7.04 v12.06,6.53
JTMS1  (via drill 0.65)
  Top 0.254: U$2.23 38.25,10 38.94,10.61 v38.94,11.12
JTMS2  (via drill 0.65)
  Top 0.254: U$26.23 38.25,32 38.94,32.61 v38.94,33.12
JTMS3  (via drill 0.65)
  Top 0.254: U$40.23 38.25,54 38.94,54.61 v38.94,55.12
JTMS4  (via drill 0.65)
  Top 0.254: U$53.23 12.75,29.65 12.06,29.04 v12.06,28.53
JTMS5  (via drill 0.65)
  Top 0.254: U$66.23 12.75,51.65 12.06,51.04 v12.06,50.53
LED_BLUE
  Top 0.254: R_BLUE.2 17.98,16.64 17.86,16.76 16.74,16.76 16,16.02 16,15.92 16,13.57 16.61,12.96 16.61,12.24 16.29,11.93 U$1.11
LED_BLUE1
  Top 0.254: R_BLUE1.2 33.02,1.01 33.14,0.89 34.26,0.89 35,1.63 35,1.73 35,4.08 34.39,4.69 34.39,5.41 34.71,5.72 U$2.11
LED_BLUE2
  Top 0.254: R_BLUE2.2 33.02,23.01 33.14,22.89 34.26,22.89 35,23.63 35,23.73 35,26.08 34.39,26.69 34.39,27.4 34.71,27.72 U$26.11
LED_BLUE3
  Top 0.254: R_BLUE3.2 33.02,45.01 33.14,44.89 34.26,44.89 35,45.63 35,45.73 35,48.08 34.39,48.69 34.39,49.41 34.71,49.72 U$40.11
LED_BLUE4
  Top 0.254: R_BLUE4.2 17.98,38.64 17.86,38.76 16.74,38.76 16,38.02 16,37.92 16,35.57 16.61,34.96 16.61,34.25 16.29,33.93 U$53.11
LED_BLUE5
  Top 0.254: R_BLUE5.2 17.98,60.64 17.86,60.76 16.74,60.76 16,60.02 16,59.92 16,57.57 16.61,56.96 16.61,56.25 16.29,55.93 U$66.11
LED_GREEN  (via drill 0.35)
  Top 0.254: U$1.9 18.12,12.13 19.37,12.13 19.37,12.12 v19.79,12.54
  Bottom 0.254: R_GREEN.2 19.41,12.92 v19.79,12.54
LED_GREEN1  (via drill 0.35)
  Top 0.254: U$2.9 32.88,5.52 31.63,5.52 31.63,5.53 v31.21,5.11
  Bottom 0.254: R_GREEN1.2 31.59,4.73 v31.21,5.11
LED_GREEN2  (via drill 0.35)
  Top 0.254: U$26.9 32.88,27.52 31.63,27.52 31.63,27.53 v31.21,27.11
  Bottom 0.254: R_GREEN2.2 31.59,26.73 v31.21,27.11
LED_GREEN3  (via drill 0.35)